# Altium PCB NFC地图卡.pcbdoc
Units mil, origin at the board's own origin, x right, y up, seen from the top; angles counter-clockwise.
Board outline 4649.77 x 2656.52 mil, 2 copper layers (Top Layer, Bottom Layer); 242 components, 94 nets, 711 pads, 3 vias.
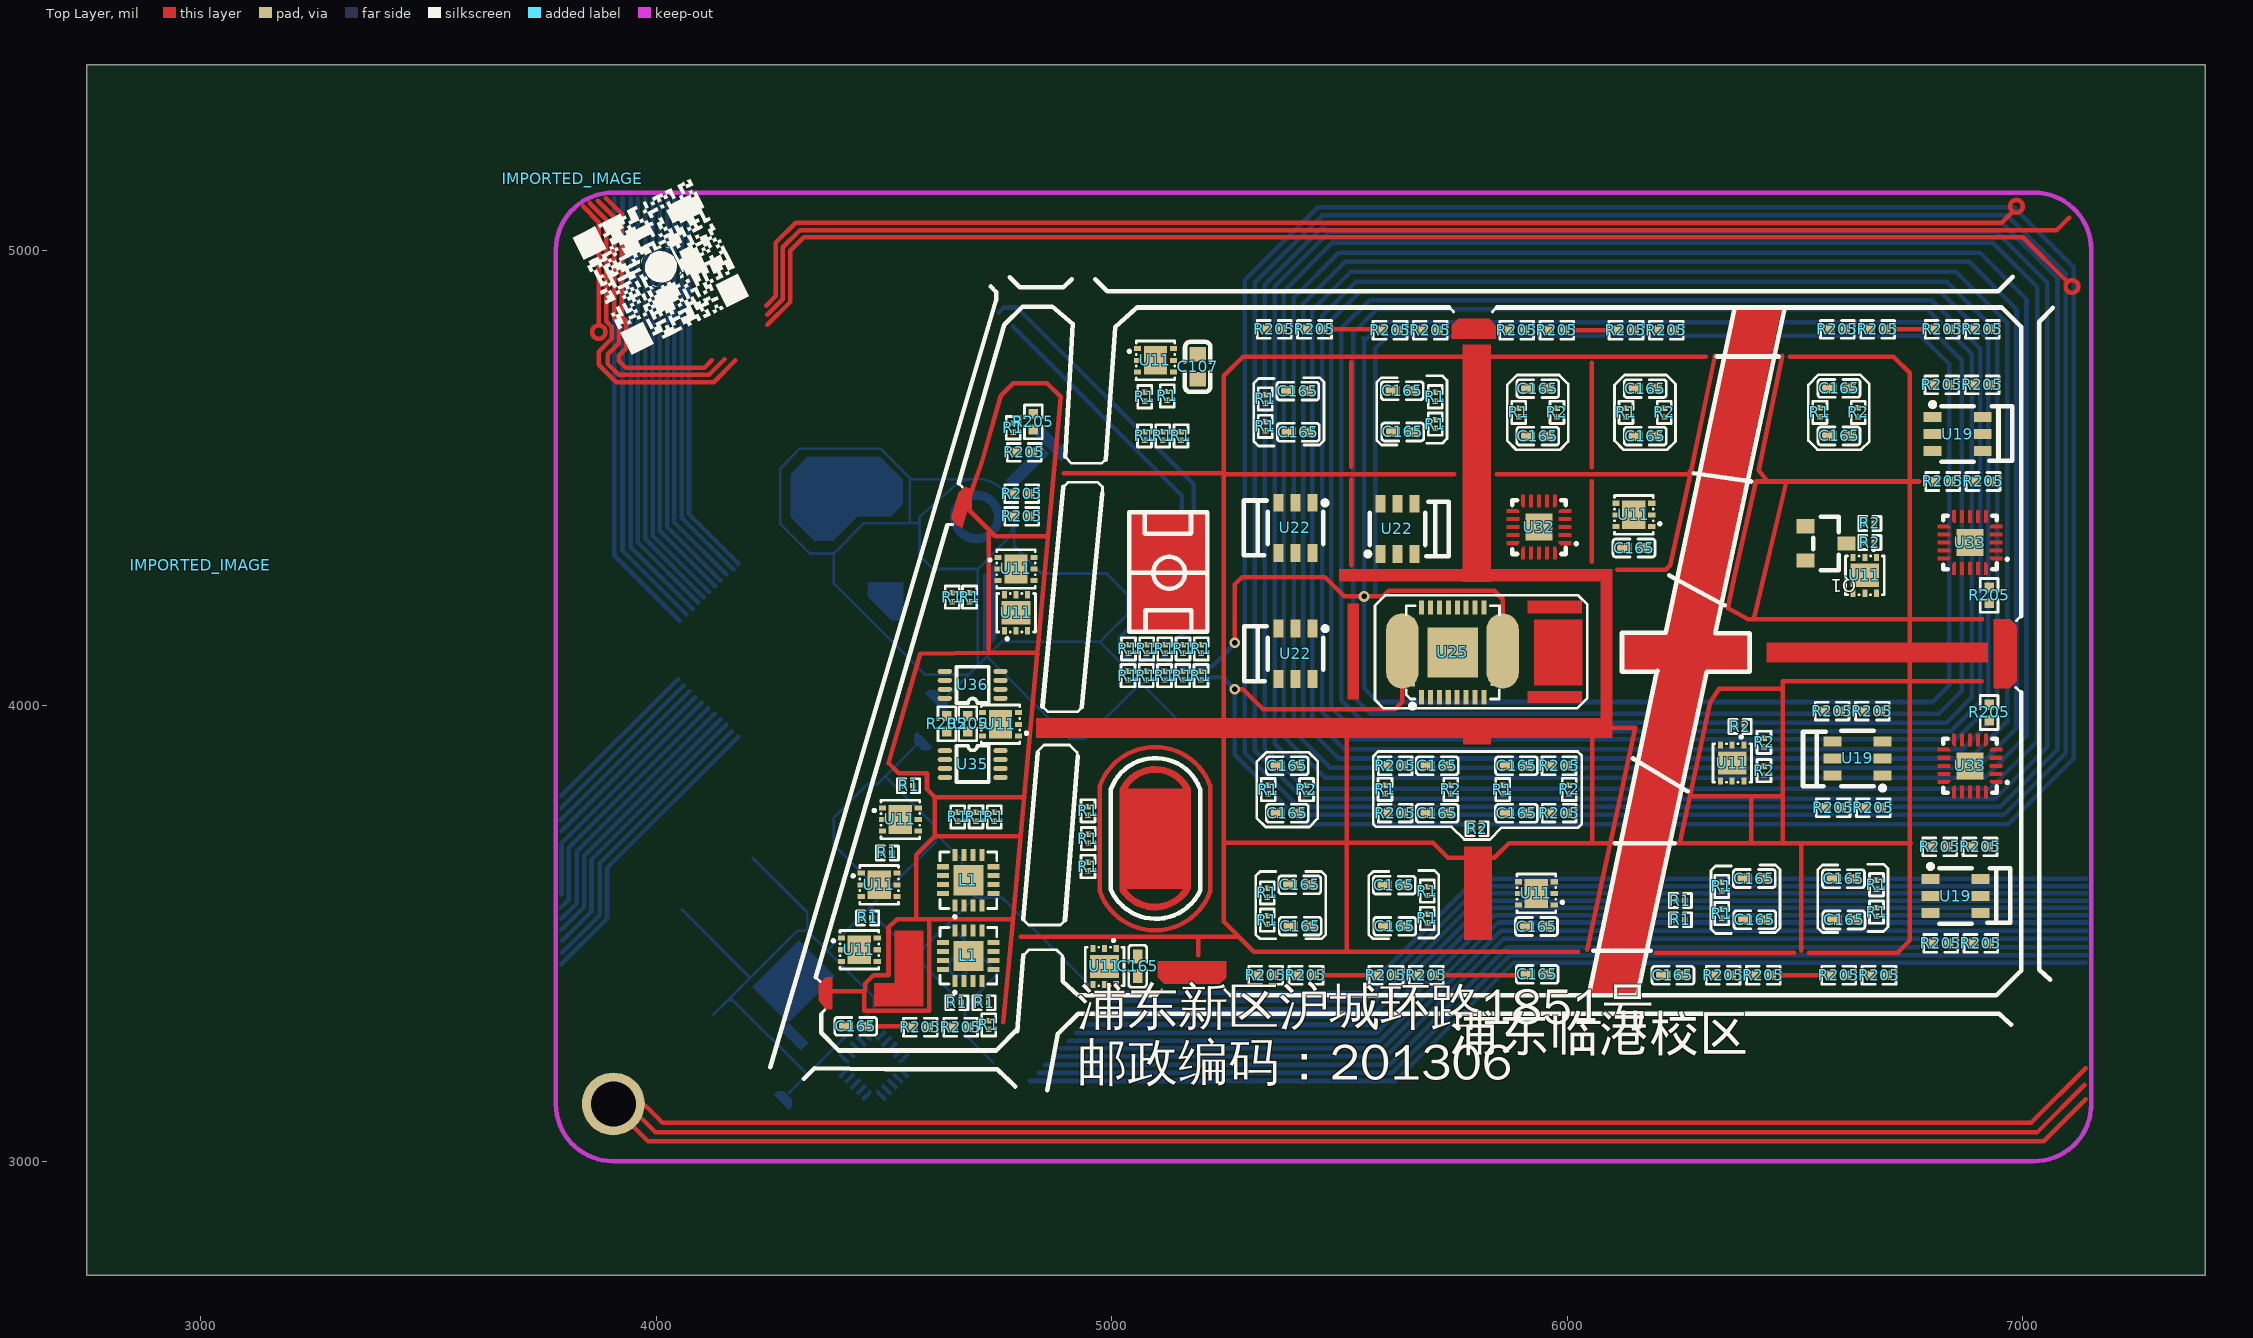
[diagram p0: Top Layer view]
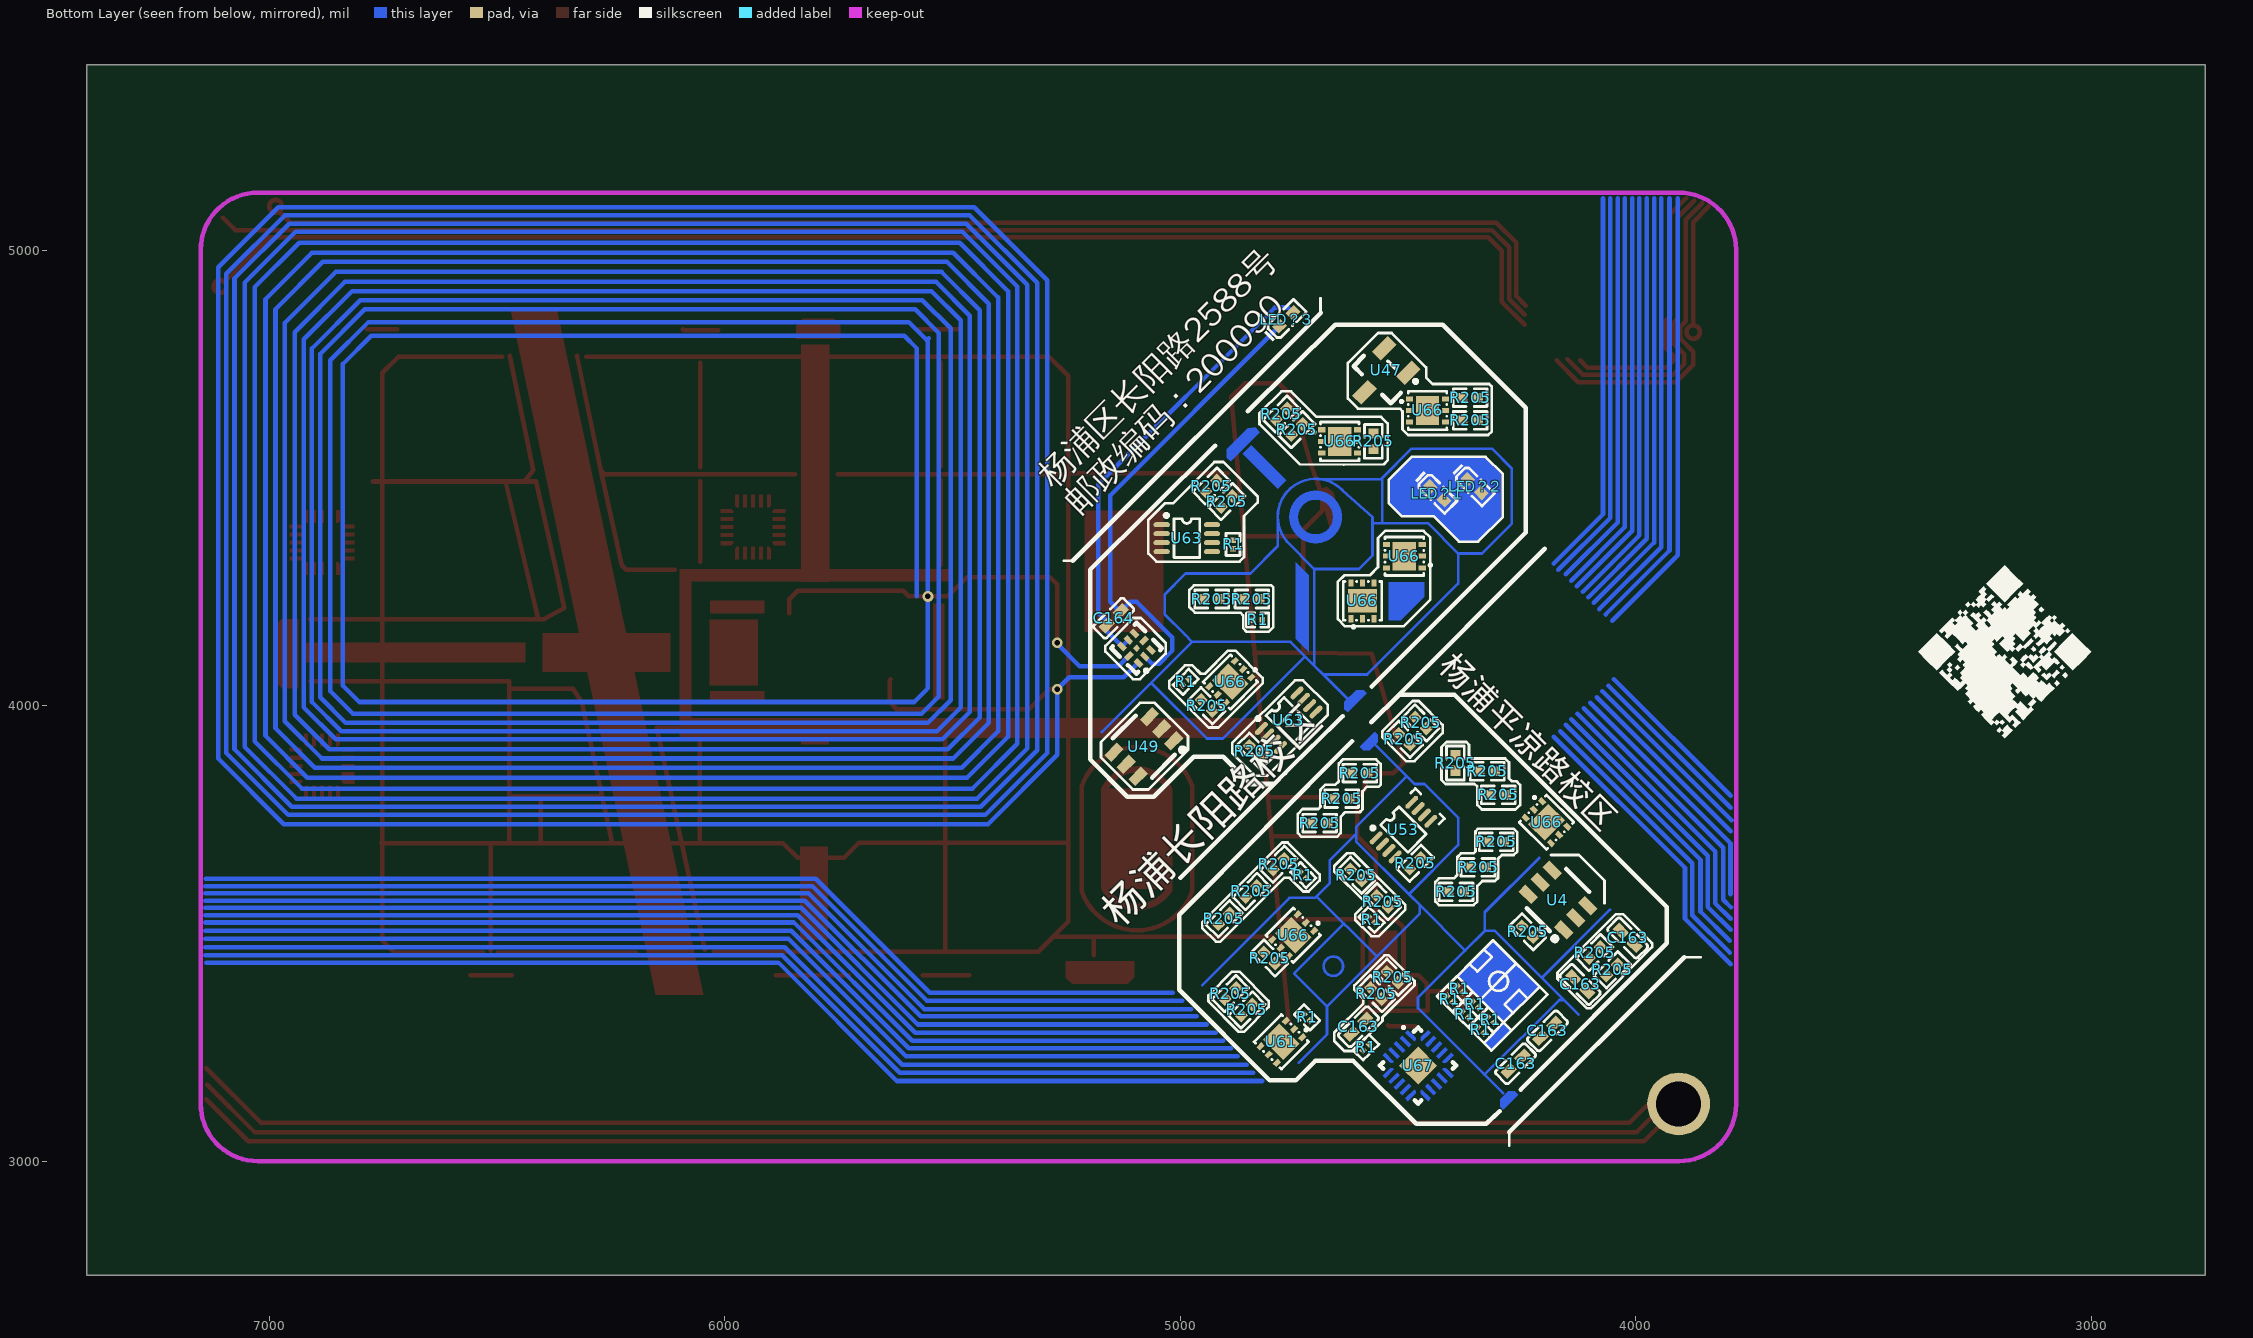
[diagram p1: Bottom Layer view, seen from below]

## Layer stack, top to bottom
Top Layer: signal copper (thickness not stored)
Dielectric: dielectric 12.6, FR-4, Dk 4.8
Bottom Layer: signal copper (thickness not stored)

## Board outline
7399.77,2750 2750,2750 2750,5406.52 7399.77,5406.52

## Components (designator, comment, footprint, x,y, rotation, side; value= is the part's Value field where it differs from the comment)
C107 "0.1u" C0603 5188.42,4744 r90 top
C163 "CAP_0402" C0402 4017.69,3490 r225 bottom
C163 "CAP_0402" C0402 4121.69,3388 r225 bottom
C163 "CAP_0402" C0402 4193.69,3286 r135 bottom
C163 "CAP_0402" C0402 4263.69,3214 r315 bottom
C163 "CAP_0402" C0402 4608.51,3295.17 r315 bottom
C164 "CAP_0402" C0402 5145.69,4192 r315 bottom
C165 "CAP_0402" C0402 5637.41,4691.21 r0 top
C165 "CAP_0402" C0402 5638.51,4600.72 r0 top
C165 "CAP_0402" C0402 5385.15,3868 r0 top
C165 "CAP_0402" C0402 5385.15,3763.67 r0 top
C165 "CAP_0402" C0402 5620,3606 r0 top
C165 "CAP_0402" C0402 5621.11,3515.51 r0 top
C165 "CAP_0402" C0402 6606,3620 r0 top
C165 "CAP_0402" C0402 6607.11,3529.51 r0 top
C165 "CAP_0402" C0402 5409.37,4600 r180 top
C165 "CAP_0402" C0402 5408.27,4690.49 r180 top
C165 "CAP_0402" C0402 5413.37,3516 r180 top
C165 "CAP_0402" C0402 5412.27,3606.49 r180 top
C165 "CAP_0402" C0402 6411.37,3530 r180 top
C165 "CAP_0402" C0402 6410.27,3620.49 r180 top
C165 "CAP_0402" C0402 5714.23,3763.67 r0 top
C165 "CAP_0402" C0402 5714.23,3868 r0 top
C165 "CAP_0402" C0402 5888.23,3763.67 r0 top
C165 "CAP_0402" C0402 5888.23,3868 r0 top
C165 "CAP_0402" C0402 6146.23,4346 r0 top
C165 "CAP_0402" C0402 5932.23,3515.12 r0 top
C165 "CAP_0402" C0402 6231.69,3408 r180 top
C165 "CAP_0402" C0402 5933.45,3410 r180 top
C165 "CAP_0402" C0402 5056.68,3427.96 r90 top
C165 "CAP_0402" C0402 4437.83,3296 r180 top
C165 "CAP_0402" C0402 5935,4696 r0 top
C165 "CAP_0402" C0402 5935,4591.67 r0 top
C165 "CAP_0402" C0402 6170.76,4696 r0 top
C165 "CAP_0402" C0402 6170.76,4591.67 r0 top
C165 "CAP_0402" C0402 6596.13,4696.29 r0 top
C165 "CAP_0402" C0402 6596.13,4591.96 r0 top
IMPORTED_IMAGE "IMPORTED_IMAGE" IMPORTED_IMAGE 3000,4308 r0 top
IMPORTED_IMAGE "IMPORTED_IMAGE" IMPORTED_IMAGE 3816.64,5156.52 r0 top
L1 "SDFL1608Q4R7KTF" VQFN-16_L3.0-W3.0-P0.50-BL-EP 4684.96,3616.81 r0 top
L1 "SDFL1608Q4R7KTF" VQFN-16_L3.0-W3.0-P0.50-BL-EP 4684.96,3450.81 r0 top
LED？1 "LED_0402-R" LED_0402 4435.69,4466 r225 bottom
LED？2 "LED_0402-R" LED_0402 4353.69,4482 r225 bottom
LED？3 "LED_0402-R" LED_0402 4767.05,4848 r135 bottom
Q1 "S8050_SOT_NPN" S8050_SOT-23 6567.61,4361 r180 top
R1 "Res_0201" R0201 4579.69,3530 r225 bottom
R1 "Res_0201" R0201 4729.69,3628 r225 bottom
R1 "Res_0201" R0201 4591.69,3250 r315 bottom
R1 "Res_0201" R0201 4721.47,3315.69 r225 bottom
R1 "Res_0201" R0201 4407.69,3356 r45 bottom
R1 "Res_0201" R0201 4373.69,3322 r45 bottom
R1 "Res_0201" R0201 4339.69,3288 r45 bottom
R1 "Res_0201" R0201 4317.92,3310.47 r45 bottom
R1 "Res_0201" R0201 4351.69,3344 r45 bottom
R1 "Res_0201" R0201 4385.69,3378 r45 bottom
R1 "Res_0201" R0201 4987.69,4052 r315 bottom
R1 "Res_0201" R0201 4829.69,4188 r0 bottom
R1 "Res_0201" R0201 4883.69,4354 r90 bottom
R1 "Res_0201" R0201 5709.9,4678 r90 top
R1 "Res_0201" R0201 5709.9,4618 r90 top
R1 "Res_0201" R0201 5343.15,3815.67 r90 top
R1 "Res_0201" R0201 5692.5,3532.79 r90 top
R1 "Res_0201" R0201 5692.5,3592.79 r90 top
R1 "Res_0201" R0201 6678.5,3546.79 r90 top
R1 "Res_0201" R0201 6678.5,3606.79 r90 top
R1 "Res_0201" R0201 5336.88,4673.21 r270 top
R1 "Res_0201" R0201 5336.88,4613.21 r270 top
R1 "Res_0201" R0201 5340.88,3589.21 r270 top
R1 "Res_0201" R0201 5340.88,3529.21 r270 top
R1 "Res_0201" R0201 6338.88,3603.21 r270 top
R1 "Res_0201" R0201 6338.88,3543.21 r270 top
R1 "Res_0201" R0201 5599.69,3816 r90 top
R1 "Res_0201" R0201 5858.23,3815.67 r90 top
R1 "Res_0201" R0201 5036.31,4124.54 r90 top
R1 "Res_0201" R0201 5076.31,4124.54 r90 top
R1 "Res_0201" R0201 5116.31,4124.54 r90 top
R1 "Res_0201" R0201 5156.31,4124.54 r90 top
R1 "Res_0201" R0201 5196.31,4124.54 r90 top
R1 "Res_0201" R0201 4947.94,3708 r90 top
R1 "Res_0201" R0201 4553.69,3824 r0 top
R1 "Res_0201" R0201 4463.69,3534 r180 top
R1 "Res_0201" R0201 4507.14,3676.53 r180 top
R1 "Res_0201" R0201 4701.69,3756 r270 top
R1 "Res_0201" R0201 4661.69,3756 r270 top
R1 "Res_0201" R0201 4741.69,3756 r270 top
R1 "Res_0201" R0201 4729.69,3299.1 r270 top
R1 "Res_0201" R0201 4719.69,3348 r0 top
R1 "Res_0201" R0201 4659.69,3348 r0 top
R1 "Res_0201" R0201 4783.69,4610 r270 top
R1 "Res_0201" R0201 5893,4643.67 r90 top
R1 "Res_0201" R0201 6128.76,4643.67 r90 top
R1 "Res_0201" R0201 6247.99,3572 r0 top
R1 "Res_0201" R0201 6247.69,3530 r0 top
R1 "Res_0201" R0201 6554.13,4643.96 r90 top
R1 "Res_0201" R0201 5075.59,4065.81 r90 top
R1 "Res_0201" R0201 5115.59,4065.81 r90 top
R1 "Res_0201" R0201 5155.59,4065.81 r90 top
R1 "Res_0201" R0201 5195.59,4065.81 r90 top
R1 "Res_0201" R0201 5035.59,4065.81 r90 top
R1 "Res_0201" R0201 5111.69,4592 r90 top
R1 "Res_0201" R0201 5151.69,4592 r90 top
R1 "Res_0201" R0201 5071.69,4592 r90 top
R1 "Res_0201" R0201 5072.31,4678 r270 top
R1 "Res_0201" R0201 5121.41,4680 r270 top
R1 "Res_0201" R0201 4649.69,4238 r90 top
R1 "Res_0201" R0201 4687.69,4238 r90 top
R1 "Res_0201" R0201 4947.69,3646.86 r90 top
R1 "Res_0201" R0201 4947.69,3768.86 r90 top
R2 "Res_0201" R0201 5427.15,3815.67 r90 top
R2 "Res_0201" R0201 5743.9,3816 r90 top
R2 "Res_0201" R0201 6003.69,3816 r90 top
R2 "Res_0201" R0201 5801.69,3729.74 r180 top
R2 "Res_0201" R0201 6663.69,4358 r180 top
R2 "Res_0201" R0201 6663.69,4400 r180 top
R2 "Res_0201" R0201 6378.92,3954 r180 top
R2 "Res_0201" R0201 6431.69,3857.24 r270 top
R2 "Res_0201" R0201 6431.69,3919.24 r270 top
R2 "Res_0201" R0201 5977,4643.67 r90 top
R2 "Res_0201" R0201 6212.76,4643.67 r90 top
R2 "Res_0201" R0201 6638.13,4643.96 r90 top
R205 "Res_0402" R0402 4471.69,3962 r45 bottom
R205 "Res_0402" R0402 4507.69,3926 r45 bottom
R205 "Res_0402" R0402 4605.36,3851.76 r180 bottom
R205 "Res_0402" R0402 4645.36,3795.76 r180 bottom
R205 "Res_0402" R0402 4693.69,3742 r180 bottom
R205 "Res_0402" R0402 4395.69,3874 r90 bottom
R205 "Res_0402" R0402 4301.69,3804 r180 bottom
R205 "Res_0402" R0402 4325.69,3856 r180 bottom
R205 "Res_0402" R0402 4483.69,3654 r315 bottom
R205 "Res_0402" R0402 4613.69,3628 r225 bottom
R205 "Res_0402" R0402 4555.69,3570 r225 bottom
R205 "Res_0402" R0402 4783.69,3652 r315 bottom
R205 "Res_0402" R0402 4843.69,3592 r315 bottom
R205 "Res_0402" R0402 4903.69,3532 r315 bottom
R205 "Res_0402" R0402 4394.37,3591.13 r180 bottom
R205 "Res_0402" R0402 4346.05,3644.89 r180 bottom
R205 "Res_0402" R0402 4306.05,3700.89 r180 bottom
R205 "Res_0402" R0402 4237.28,3503.59 r225 bottom
R205 "Res_0402" R0402 4051.69,3420 r315 bottom
R205 "Res_0402" R0402 4089.69,3458 r315 bottom
R205 "Res_0402" R0402 4533.64,3403.95 r45 bottom
R205 "Res_0402" R0402 4569.64,3367.95 r45 bottom
R205 "Res_0402" R0402 4803.69,3446 r225 bottom
R205 "Res_0402" R0402 4889.69,3368 r315 bottom
R205 "Res_0402" R0402 4853.69,3332 r315 bottom
R205 "Res_0402" R0402 4835.69,3900 r45 bottom
R205 "Res_0402" R0402 4941.69,4000 r45 bottom
R205 "Res_0402" R0402 4930.51,4234 r180 bottom
R205 "Res_0402" R0402 4842.51,4234 r180 bottom
R205 "Res_0402" R0402 4931.69,4482 r315 bottom
R205 "Res_0402" R0402 4897.69,4448 r315 bottom
R205 "Res_0402" R0402 4575.69,4580 r90 bottom
R205 "Res_0402" R0402 4743.69,4606 r135 bottom
R205 "Res_0402" R0402 4777.69,4640 r315 bottom
R205 "Res_0402" R0402 4363.37,4676.16 r0 bottom
R205 "Res_0402" R0402 4363.37,4626.16 r0 bottom
R205 "Res_0402" R0402 6905.69,3690 r0 top
R205 "Res_0402" R0402 6907.69,3478 r0 top
R205 "Res_0402" R0402 6817.37,3690 r0 top
R205 "Res_0402" R0402 6819.37,3478 r0 top
R205 "Res_0402" R0402 6821.94,4704.01 r0 top
R205 "Res_0402" R0402 6910.25,4704.01 r0 top
R205 "Res_0402" R0402 6823.94,4492.01 r0 top
R205 "Res_0402" R0402 6912.25,4492.01 r0 top
R205 "Res_0402" R0402 6671.44,3775.99 r180 top
R205 "Res_0402" R0402 6583.12,3775.99 r180 top
R205 "Res_0402" R0402 6669.44,3987.99 r180 top
R205 "Res_0402" R0402 6581.12,3987.99 r180 top
R205 "Res_0402" R0402 6925.69,3984.93 r90 top
R205 "Res_0402" R0402 6925.69,4242 r90 top
R205 "Res_0402" R0402 5621.69,3868 r0 top
R205 "Res_0402" R0402 5621.69,3764 r0 top
R205 "Res_0402" R0402 5981.56,3868 r0 top
R205 "Res_0402" R0402 5981.69,3764 r0 top
R205 "Res_0402" R0402 4637.69,3960.32 r90 top
R205 "Res_0402" R0402 4683.69,3960.32 r90 top
R205 "Res_0402" R0402 6684,3408 r180 top
R205 "Res_0402" R0402 6595.69,3408 r180 top
R205 "Res_0402" R0402 6430,3408 r180 top
R205 "Res_0402" R0402 6341.69,3408 r180 top
R205 "Res_0402" R0402 5426,3408 r180 top
R205 "Res_0402" R0402 5337.69,3408 r180 top
R205 "Res_0402" R0402 5690,3408 r180 top
R205 "Res_0402" R0402 5601.69,3408 r180 top
R205 "Res_0402" R0402 6592.51,4826 r180 top
R205 "Res_0402" R0402 6680.82,4826 r180 top
R205 "Res_0402" R0402 6822.51,4826 r180 top
R205 "Res_0402" R0402 6910.82,4826 r180 top
R205 "Res_0402" R0402 5888.51,4824 r180 top
R205 "Res_0402" R0402 5976.82,4824 r180 top
R205 "Res_0402" R0402 6128.51,4824 r180 top
R205 "Res_0402" R0402 6216.82,4824 r180 top
R205 "Res_0402" R0402 5356.51,4826 r180 top
R205 "Res_0402" R0402 5444.82,4826 r180 top
R205 "Res_0402" R0402 5610.51,4824 r180 top
R205 "Res_0402" R0402 5698.82,4824 r180 top
R205 "Res_0402" R0402 4667.85,3294 r180 top
R205 "Res_0402" R0402 4579.53,3294 r180 top
R205 "Res_0402" R0402 4802.17,4465.43 r180 top
R205 "Res_0402" R0402 4802.17,4415.43 r180 top
R205 "Res_0402" R0402 4827.69,4623 r270 top
R205 "Res_0402" R0402 4807.69,4556 r0 top
U4 "ADC081S021CIMFX/NOPB" SOT-23-6_L2.9-W1.6-P0.95-LS2.8-BR 4170.51,3573.17 r225 bottom
U11 "AM01B" DFN-6_L2.0-W2.0-P0.65-BL-EP 4755.45,3959.06 r90 top
U11 "AM01B" DFN-6_L2.0-W2.0-P0.65-BL-EP 6145.69,4418.67 r90 top
U11 "AM01B" DFN-6_L2.0-W2.0-P0.65-BL-EP 6652.77,4286 r180 top
U11 "AM01B" DFN-6_L2.0-W2.0-P0.65-BL-EP 5931.69,3587.79 r90 top
U11 "AM01B" DFN-6_L2.0-W2.0-P0.65-BL-EP 6361.7,3874 r180 top
U11 "AM01B" DFN-6_L2.0-W2.0-P0.65-BL-EP 4984,3427.42 r180 top
U11 "AM01B" DFN-6_L2.0-W2.0-P0.65-BL-EP 4445.7,3464.13 r270 top
U11 "AM01B" DFN-6_L2.0-W2.0-P0.65-BL-EP 4535.7,3750.13 r270 top
U11 "AM01B" DFN-6_L2.0-W2.0-P0.65-BL-EP 4489.15,3606.66 r270 top
U11 "AM01B" DFN-6_L2.0-W2.0-P0.65-BL-EP 4789.56,4300.02 r270 top
U11 "AM01B" DFN-6_L2.0-W2.0-P0.65-BL-EP 4789.67,4203.87 r0 top
U11 "AM01B" DFN-6_L2.0-W2.0-P0.65-BL-EP 5095.56,4758.01 r270 top
U19 "ADC081S021CIMFX/NOPB" SOT-23-6_L2.9-W1.6-P0.95-LS2.8-BR 6852,3582 r180 top
U19 "ADC081S021CIMFX/NOPB" SOT-23-6_L2.9-W1.6-P0.95-LS2.8-BR 6856.57,4596.01 r180 top
U19 "ADC081S021CIMFX/NOPB" SOT-23-6_L2.9-W1.6-P0.95-LS2.8-BR 6636.81,3883.99 r0 top
U22 "ADC081S021CIMFX/NOPB" SOT-23-6_L2.9-W1.6-P0.95-LS2.8-BR 5626.81,4388.01 r270 top
U22 "ADC081S021CIMFX/NOPB" SOT-23-6_L2.9-W1.6-P0.95-LS2.8-BR 5402.81,4390.24 r90 top
U22 "ADC081S021CIMFX/NOPB" SOT-23-6_L2.9-W1.6-P0.95-LS2.8-BR 5403.2,4114 r90 top
U25 "AT42QT1110-MUR" qfn-32_l5.0-w5.0-p0.50-bl-ep3.4 5748.25,4116.95 r0 top
U32 "AT42QT1040-MMHR" VQFN-20_L3.0-W3.0-P0.45-TL-EP 5937.69,4391.93 r180 top
U33 "AT42QT1040-MMHR" VQFN-20_L3.0-W3.0-P0.45-TL-EP 6883.69,3867.88 r180 top
U33 "AT42QT1040-MMHR" VQFN-20_L3.0-W3.0-P0.45-TL-EP 6883.69,4358 r180 top
U35 "74HC2G00DC,125" VSSOP-8_L2.1-W2.4-P0.50-LS3.2-BL 4694.44,3871.68 r270 top
U36 "74HC2G00DC,125" VSSOP-8_L2.1-W2.4-P0.50-LS3.2-BL 4694.44,4045.68 r90 top
U47 "BC817-25-QR" SOT-23-3_L2.9-W1.5-P1.90-LS2.6-BR 4560.49,4722.8 r135 bottom
U49 "ADC081S021CIMFX/NOPB" SOT-23-6_L2.9-W1.6-P0.95-LS2.8-BR 5079.69,3910 r135 bottom
U53 "SN74LVC1G123DCUR_C352969" VSSOP-8_L2.3-W2.0-P0.50-LS3.1-BL 4509.69,3728 r225 bottom
U61 "AM01B" DFN-6_L2.0-W2.0-P0.65-BL-EP 4777.68,3261.99 r45 bottom
U63 "SN74LVC1G123DCUR_C352969" VSSOP-8_L2.3-W2.0-P0.50-LS3.1-BL 4761.69,3968 r225 bottom
U63 "SN74LVC1G123DCUR_C352969" VSSOP-8_L2.3-W2.0-P0.50-LS3.1-BL 4985.27,4367.58 r270 bottom
U66 "AM01B" DFN-6_L2.0-W2.0-P0.65-BL-EP 4195.69,3744 r315 bottom
U66 "AM01B" DFN-6_L2.0-W2.0-P0.65-BL-EP 4751.68,3495.99 r45 bottom
U66 "AM01B" DFN-6_L2.0-W2.0-P0.65-BL-EP 4889.68,4051.99 r45 bottom
U66 "AM01B" DFN-6_L2.0-W2.0-P0.65-BL-EP 4507.69,4328 r90 bottom
U66 "AM01B" DFN-6_L2.0-W2.0-P0.65-BL-EP 4599.7,4230 r180 bottom
U66 "AM01B" DFN-6_L2.0-W2.0-P0.65-BL-EP 4456.8,4648.02 r270 bottom
U66 "AM01B" DFN-6_L2.0-W2.0-P0.65-BL-EP 4649.69,4580.01 r270 bottom
U67 "AT42QT1040-MMHR" VQFN-20_L3.0-W3.0-P0.45-TL-EP 4477.69,3210 r225 bottom
? "NT3H1101W0FHKH" XQFN-8_L1.6-W1.6-P0.50-BR 5095.69,4126 r225 bottom

## Footprints (in the part's own frame and the unit in brackets; to place one, negate y for a bottom-side part, rotate by r counter-clockwise, add the part's x,y. Pads: shape width x height; smd on the part's side, far side on the other; paste and mask are expansions set on the pad)
C0402 [mm]
  rect 0.79x0.54 smd paste-100 mask+0.051: 1(-0.545,0) 2(0.545,0)
  silkscreen extent -1.17,-0.5 1.17,0.5
C0603 [mm]
  rect 0.8x0.9 smd paste+0 mask+0.051: 1(-0.7,0) 2(0.7,0)
  silkscreen extent -1.41,-0.71 1.39,0.72
DFN-6_L2.0-W2.0-P0.65-BL-EP [mm]
  rect 0.28x0.4 smd paste+0 mask+0.05: 1(-0.65,-1) 2(0,-1) 3(0.65,-1) 4(0.65,1) 5(0,1) 6(-0.65,1)
  rect 1.6x1.3 smd paste+0 mask+0.05: 7(0,0)
  silkscreen extent -1.08,-1.52 1.08,1.08
IMPORTED_IMAGE [mil]
LED_0402 [mil]
  rect 25.1x21.3 smd paste-3937.01 mask+2: 1(-21.2,0) 2(21.2,0)
  silkscreen extent -55,-21 43,21
qfn-32_l5.0-w5.0-p0.50-bl-ep3.4 [mm]
  oval 1.8x4.2 smd mask+0.051: 1(-2.814,0.071) 1(2.786,0.071)
  rect 0.28x0.8 smd paste+0 mask+0.051: 1(-1.75,-2.5) 2(-1.251,-2.5) 3(-0.751,-2.5) 4(-0.251,-2.5) 5(0.249,-2.5) 6(0.749,-2.5) 7(1.249,-2.5) 8(1.749,-2.5) 17(1.752,2.5) 18(1.251,2.5) 19(0.752,2.5) 20(0.251,2.5) 21(-0.248,2.5) 22(-0.749,2.5) 23(-1.248,2.5) 24(-1.749,2.5)
  rect 0.8x0.28 smd paste+0 mask+0.051: 9(2.5,-1.748) 10(2.5,-1.248) 11(2.5,-0.748) 12(2.5,-0.248) 13(2.5,0.252) 14(2.5,0.752) 15(2.5,1.252) 16(2.5,1.752) 25(-2.5,1.75) 26(-2.5,1.25) 27(-2.5,0.75) 28(-2.5,0.25) 29(-2.5,-0.25) 30(-2.5,-0.75) 31(-2.5,-1.25) 32(-2.5,-1.75)
  rect 2.794x2.794 smd paste+0 mask+0.051: 33(0,0)
  silkscreen extent -2.6,-3.12 2.6,2.6
R0201 [mil]
  rect 11.93x12.76 smd paste-3937.01 mask+2: 1(-9.51,0) 2(9.51,0)
  silkscreen extent -24,-15 24,15
R0402 [mm]
  rect 0.566x0.54 smd paste-100 mask+0.051: 1(-0.433,0) 2(0.433,0)
  silkscreen extent -0.94,-0.5 0.94,0.5
S8050_SOT-23 [mm]
  rect 1x0.8 smd paste+0 mask+0.051: 1(1.15,-0.823) 2(1.15,1.077) 3(-1.15,0.127)
  silkscreen extent -0.7,-1.37 0.7,1.63
SOT-23-3_L2.9-W1.5-P1.90-LS2.6-BR [mm]
  rect 1.25x0.7 smd paste+0 mask+0.051: 1(1.25,-0.95) 2(1.25,0.95) 3(-1.25,0)
  silkscreen extent -0.65,-1.69 1.29,1.46
SOT-23-6_L2.9-W1.6-P0.95-LS2.8-BR [mm]
  rect 1x0.55 smd paste+0 mask+0.051: 1(1.4,-0.95) 2(1.4,0) 3(1.4,0.95) 4(-1.4,0.95) 5(-1.4,0) 6(-1.4,-0.95)
  silkscreen extent -0.9,-1.78 1.52,1.55
VQFN-16_L3.0-W3.0-P0.50-BL-EP [mm]
  rect 0.28x0.665 smd paste-100 mask+0.051: 1(-0.75,-1.407) 2(-0.25,-1.407) 3(0.25,-1.407) 4(0.75,-1.407) 9(0.75,1.407) 10(0.25,1.407) 11(-0.25,1.407) 12(-0.75,1.407)
  rect 0.665x0.28 smd paste-100 mask+0.051: 5(1.407,-0.75) 6(1.407,-0.25) 7(1.407,0.25) 8(1.407,0.75) 13(-1.407,0.75) 14(-1.407,0.25) 15(-1.407,-0.25) 16(-1.407,-0.75)
  rect 1.68x1.68 smd paste-100 mask+0.051: 17(0,0)
  silkscreen extent -1.58,-2.11 1.58,1.58
VQFN-20_L3.0-W3.0-P0.45-TL-EP [mm]
  rect 1.5x1.5 smd paste+0 mask+0.05: 21(0,0)
  Top Layer region: 0.55,-1.7 0.55,-1.8 0.35,-1.8 0.35,-1.1 0.55,-1.1
  Top Layer region: -0.8,-1.1 -0.8,-1.8 -1,-1.8 -1,-1.25 -1,-1.2 -0.9,-1.1
  Top Layer region: -1.1,0.8 -1.8,0.8 -1.8,1 -1.25,1 -1.2,1 -1.1,0.9
  Top Layer region: 1.1,0.8 1.8,0.8 1.8,1 1.25,1 1.2,1 1.1,0.9
  Top Layer region: 0.8,1.1 0.8,1.8 1,1.8 1,1.25 1,1.2 0.9,1.1
  Top Layer region: 0.8,-1.1 0.8,-1.8 1,-1.8 1,-1.25 1,-1.2 0.9,-1.1
  Top Layer region: 1.1,-0.8 1.8,-0.8 1.8,-1 1.25,-1 1.2,-1 1.1,-0.9
  Top Layer region: 0.1,1.2 0.1,1.1 -0.1,1.1 -0.1,1.8 0.1,1.8
  Top Layer region: 0.55,1.2 0.55,1.1 0.35,1.1 0.35,1.8 0.55,1.8
  Top Layer region: 1.2,0.35 1.1,0.35 1.1,0.55 1.8,0.55 1.8,0.35
  Top Layer region: 1.2,-0.1 1.1,-0.1 1.1,0.1 1.8,0.1 1.8,-0.1
  Top Layer region: 1.2,-0.55 1.1,-0.55 1.1,-0.35 1.8,-0.35 1.8,-0.55
  Top Layer region: -1.2,0.35 -1.1,0.35 -1.1,0.55 -1.8,0.55 -1.8,0.35
  Top Layer region: -1.2,-0.1 -1.1,-0.1 -1.1,0.1 -1.8,0.1 -1.8,-0.1
  Top Layer region: -1.2,-0.55 -1.1,-0.55 -1.1,-0.35 -1.8,-0.35 -1.8,-0.55
  Top Layer region: -1.1,-0.8 -1.8,-0.8 -1.8,-1 -1.25,-1 -1.2,-1 -1.1,-0.9
  Top Layer region: -0.55,-1.7 -0.55,-1.8 -0.35,-1.8 -0.35,-1.1 -0.55,-1.1
  Top Layer region: -0.1,-1.7 -0.1,-1.8 0.1,-1.8 0.1,-1.1 -0.1,-1.1
  Top Layer region: -0.55,1.2 -0.55,1.1 -0.35,1.1 -0.35,1.8 -0.55,1.8
  Top Layer region: -0.8,1.1 -0.8,1.8 -1,1.8 -1,1.25 -1,1.2 -0.9,1.1
  silkscreen extent -2.15,-1.5 1.5,1.5
VSSOP-8_L2.1-W2.4-P0.50-LS3.2-BL [mm]
  oval 0.28x0.8 smd paste+0 mask+0.051: 1(-0.75,-1.55) 2(-0.25,-1.55) 3(0.25,-1.55) 4(0.75,-1.55) 5(0.75,1.55) 6(0.25,1.55) 7(-0.25,1.55) 8(-0.75,1.55)
  silkscreen extent -1.02,-0.9 1,0.9
VSSOP-8_L2.3-W2.0-P0.50-LS3.1-BL [mm]
  oval 0.28x0.905 smd paste+0 mask+0.051: 1(-0.75,-1.402) 2(-0.25,-1.403) 3(0.25,-1.403) 4(0.75,-1.402) 5(0.75,1.403) 6(0.25,1.403) 7(-0.25,1.403) 8(-0.75,1.403)
  silkscreen extent -1.37,-1.24 1.08,0.72
XQFN-8_L1.6-W1.6-P0.50-BR [mm]
  rect 0.5x0.3 smd paste+0 mask+0.051: 1(0.65,-0.5) 2(0.65,0) 3(0.65,0.5) 5(-0.65,0.5) 6(-0.65,0) 7(-0.65,-0.5)
  rect 0.3x0.5 smd paste+0 mask+0.051: 4(0,0.6) 8(0,-0.6)
  rect 0.3x0.3 smd paste+0 mask+0.051: 9(0,0)
  silkscreen extent -1,-1 1.33,1

## Free pads (board coordinates)
  round 137.8 hole 98.43 mask+2: 1(3905.69,3125.79)

## Via types
v1: diameter 24, hole 12, Top Layer to Bottom Layer, 3 vias

## Nets (pads, with @x,y where several pads share a name; then routed paths per layer and width w, separated by ;. In a path a pad name is that pad's centre, name@x,y a point inside that pad or via, vN(x,y) a via of type N, cw(c..) or ccw(c..) an arc to the next point about the centre after c; other vN are vias at no path point)
1: 
C1_1: C107.1
C1_2: C107.2
S$45027:  | length 337.7
  Top Layer w14.96: 5023.69,3596 ccw(c5094.02,3642.01) 5163.69,3595 ; 5025.69,3818 cw(c5095.43,3781.1) 5165.69,3817
S$45063:  | length 1091.9
  Top Layer w10: 4973.69,3823 4973.69,3592 ccw(c5094.69,3635.29) 5215.69,3592 ; 4973.69,3824 cw(c5094.64,3780.51) 5215.73,3823.64 ; 5215.69,3594 5215.69,3824
S$61466:  | length 58.1
  Top Layer w10: 6091.69,3954 6094.58,3951.11 6148.63,3951.11
S$96601:  | length 923.6
  Bottom Layer w10: 4745.69,4414.08 ccw(c4702.69,4414.08) 4745.69,4414.08 ; 4755.69,4414.08 ccw(c4702.69,4414.08) 4755.69,4414.08
  Bottom Layer w13.78: 4753.69,4414.08 ccw(c4702.69,4414.08) 4753.69,4414.08
U2_1: U47.1
U2_2: U47.2
U2_3: U47.3
U3_2:  | length 413.8
  Top Layer w10: 6412.9,4490.21 6366.47,4281.79 6351.69,4214 6395.69,4190 6476.46,4190
U4_1: U4.1 U19.1 U22.1 U49.1
U4_2: U4.2 U19.2 U22.2 U49.2
U4_3: U4.3 U19.3 U22.3 U49.3
U4_4: U4.4 U19.4 U22.4 U49.4
U4_5: U4.5 U19.5 U22.5 U49.5
U4_6: U4.6 U19.6 U22.6 U49.6
U7_1: U53.1 U63.1
U7_2: U53.2 U63.2
U7_3: U53.3 U63.3
U7_4: U53.4 U63.4
U7_5: U53.5 U63.5
U7_6: U53.6 U63.6 | length 1815
  Bottom Layer w5.91: 4389.69,4334 4389.69,4268 4589.4,4068.29 4685.98,4068.29 ; 4631.69,4014 4757.69,4140 4973.69,4140 ; 4705.69,4089.78 4705.69,4300 ; 4725.69,4108 4905.69,3928 4941.25,3928 5063.47,4050.22 ; 4989.69,4156 4973.69,4140 ; 5171.69,3942 4973.69,4140
U7_7: U53.7 U63.7
U7_8: U53.8 U63.8
U8_1: U35.1 U36.1
U8_2: U35.2 U36.2
U8_3: U35.3 U36.3
U8_4: U35.4 U36.4
U8_5: U35.5 U36.5
U8_6: U35.6 U36.6
U8_7: U35.7 U36.7
U8_8: U35.8 U36.8
U11_1: U11.1 U61.1 U66.1
U11_2: U11.2 U61.2 U66.2
U11_3: U11.3 U61.3 U66.3
U11_4: U11.4 U61.4 U66.4
U11_5: U11.5 U61.5 U66.5
U11_6: U11.6 U61.6 U66.6
U11_7: U11.7 U61.7 U66.7
U15_1: 
U15_2: 
U15_3: 
U15_4: 
U15_5: 
U15_6: 
U15_7: 
U15_8: 
U15_9: 
U15_10: 
U15_11: 
U15_12: 
U15_13: 
U15_14:  | length 11207.3
  Top Layer w10: 4381.61,3372.76 4456.44,3372.76 ; 4592.84,3530.85 4528.75,3530.85 4509.69,3514 4509.69,3408 4476.79,3408 4458.96,3390.18 4458.96,3379.28 4456.44,3372.76 ; 4599.29,3530.85 4599.29,3330 4456.44,3330 4456.44,3372.76 ; 4609.69,3798 4611.05,3799.36 ; 4729.52,4379.08 4729.52,4116 ; 4761.69,3305.09 4780,3500.31 ; 4780.03,3499.89 4837.69,4128 ; 4782.87,3530.85 4570.84,3530.85 4570.65,3553.04 4570.65,3672.93 4611.05,3713.33 ; 4799.69,3714 4799.02,3713.33 4611.05,3713.33 ; 4800.03,3493 5278.69,3493 ; 4807.52,3799.36 4611.05,3799.36 ; 4836.89,4124.16 4887.69,4678 4857.69,4708 4783.69,4708 4755.69,4680 4713.69,4532 4687.69,4460.15 4687.69,4428 4743.92,4371.77 4859.6,4371.77 ; 4837.69,4114 4835.69,4116 4729.52,4116 ; 5189.46,3452 5189.46,3492.76 ; 5249.66,3698.7 5704.99,3698.7 5737.69,3666 5839.69,3666 5871.69,3698 6753.71,3698 ; 5515.69,3698 5515.69,3464 5517.69,3462 ; 5515.96,3936 5515.96,3702 5517.96,3700 ; 6043.64,3464.45 6097.56,3713.55 ; 6053.69,4316 6053.69,4492.94 ; 6054.05,3934 6054.05,3700 6056.05,3698 ; 6097.21,3700 6095.21,3702 6148.63,3951.11 ; 6246.6,3698 6313.58,4008 6332.38,4036.69 6472.29,4036.69 ; 6268.92,3801.28 6472.29,3801.28 ; 6401.69,3700 6403.81,3702.12 6403.81,3801.28 ; 6409.23,4190 6480.9,4492.21 ; 6413.69,4492 6771.69,4492 ; 6439.76,4492 6420,4516.43 6471.8,4768 ; 6472.29,3698 6472.29,4054 6909.52,4054 ; 6476.46,4190 6910.39,4190 ; 6509.73,3698 6512.96,3694.76 6512.96,3462 ; 4611.05,3713.33 4611.05,3799.36 ; 4611.05,3799.36 4594.11,3816.3 4594.11,3851.55 4532.14,3851.55 4509.69,3874 4579.69,4114 4729.52,4116
U15_15: 
U15_16: 
U15_17: 
U15_18: 
U15_19: 
U15_20: 
U15_21: U32.21 U33.21 U67.21
U16_2: U25.2
U16_3: U25.3
U16_4: U25.4
U16_5: U25.5
U16_6: U25.6
U16_7: U25.7
U16_8: U25.8
U16_9: U25.9
U16_10: U25.10
U16_11: U25.11
U16_12: U25.12
U16_13: U25.13
U16_14: U25.14
U16_15: U25.15
U16_16: U25.16
U16_17: U25.17
U16_18: U25.18
U16_19: U25.19
U16_20: U25.20
U16_21: U25.21
U16_22: U25.22
U16_23: U25.23
U16_24: U25.24
U16_25: U25.25
U16_26: U25.26
U16_27: U25.27
U16_28: U25.28
U16_29: U25.29
U16_30: U25.30
U16_31: U25.31
U16_32: U25.32 | length 27.3
  Top Layer w10: 5635.69,4058 5637.69,4056 5637.69,4031.54
U16_33: U25.33
"": ?.1 ?.2 ?.3 ?.4 ?.5 ?.6 ?.7 ?.8 ?.9 C163.1 C163.2 C164.1 C164.2 C165.1 C165.2 L1.1 L1.2 L1.3 L1.4 L1.5 L1.6 L1.7 L1.8 L1.9 L1.10 L1.11 L1.12 L1.13 L1.14 L1.15 L1.16 L1.17 LED？1.1 LED？1.2 LED？2.1 LED？2.2 LED？3.1 LED？3.2 pad.1 Q1.1 Q1.2 Q1.3 R1.1 R1.2 R2.1 R2.2 R205.1 R205.2 U25.1 | length 153966
  Top Layer w10: 3839.69,5096 3873.69,5061.19 3873.69,4834.75 ; 3853.69,5104 3853.69,5102.88 3889.69,5066.88 3889.69,4844 3901.69,4832 3901.69,4804.98 3873.69,4776.98 3873.69,4748 3911.69,4710 4020.31,4710 4125.69,4710 4173.69,4758 ; 3871.69,5108 3907.69,5072 3907.69,4850 3917.69,4840 3917.69,4795.28 3893.69,4771.28 3893.69,4750 3917.69,4726 4019.72,4726 ; 3889.43,5114 3923.69,5079.74 3923.69,4854.47 3933.69,4844.47 3933.69,4784.25 3917.69,4768.25 3917.69,4757.21 3933.69,4741.21 3934.48,4742 4020.31,4742 4105.69,4742 4121.86,4758.18 ; 3951.69,3074 3981.69,3044 7045.69,3044 7137.69,3136 ; 3969.69,3092 3997.69,3064 7031.69,3064 7135.69,3168 ; 3977.69,3120 4013.69,3084 7017.69,3084 7137.69,3204 ; 4001.72,4726 4115.69,4726 4149.69,4760 ; 4241.69,4878 4261.69,4898.35 4261.69,5016 4305.69,5060 6953.69,5060 6975.69,5082 ; 4243.69,4836 4293.85,4886.16 4293.85,4897.02 4293.85,4998.32 4323.85,5028 6999.69,5028 7097.69,4930 ; 4243.69,4858 4277.69,4892 4277.69,4897.36 4277.69,5006 4315.69,5044 7074.08,5044 7101.08,5071 ; 4483.84,3296 4541.69,3296 4543.69,3298 ; 4894.21,4510 5243.65,4510 ; 5247.19,4508 5751.69,4508 ; v1(5269.69,4036) 5287.69,4036 5331.69,3992 5621.69,3992 5637.69,4008 5637.69,4031.54 ; v1(5269.69,4138) 5269.69,4266 5285.69,4282 5467.69,4282 5509.69,4240 v1(5553.69,4240) 5595.63,4240 5607.63,4252 5839.69,4252 5857.92,4233.76 5857.92,4202.44 ; 5463.18,3408 5564.51,3408 ; 5482,4826 5573.33,4826 ; 5525.69,4308.5 5525.69,4496 ; 5525.69,4524.12 5525.69,4754 ; 5727.18,3408 5887.44,3408 ; 5845.19,4508 6263.69,4508 6272.11,4516.43 ; 6014,4824 6089.69,4824 6091.69,4826 ; 6024.01,3460 5311.69,3460 5245.69,3526 5245.69,4724 5287.69,4766 6304,4766 ; 6053.69,4523.06 6053.69,4752.94 ; 6109.69,4298 6215.69,4298 6225.69,4308 6272.11,4516.43 ; 6193.69,3458 6497.47,3458 ; 6323.91,4768 6272.11,4516.43 ; 6467.18,3408 6558.51,3408 ; 6487.68,4766 6715.69,4766 6751.3,4730.39 6751.3,3484.54 6726.76,3460 ; 6529.69,3458 6725.69,3458 ; 6718,4826 6785.33,4826 ; 3888.44,4820 ccw(c3873.69,4820) 3888.44,4820 ; 6999.69,5096 ccw(c6985.69,5096) 6999.69,5096 ; 7121.69,4920 ccw(c7107.69,4920) 7121.69,4920
  Bottom Layer w5.91: 4055.69,3552 4056.72,3552 4206.2,3402.52 ; 4125.69,3322 4157.69,3354 ; 4211.69,3666 4331.28,3546.41 4331.28,3505.58 ; 4291.15,3149.46 4331.69,3190 ; 4556.45,4400.49 4556.45,4482.62 4556.45,4496.62 4697.86,4496.62 ; 4557.69,4498 4491.69,4564 4315.69,4564 4271.69,4520 4271.69,4400 4337.69,4334 4389.69,4334 4456.18,4400.49 4577.69,4400.49 ; 4569.32,3448.37 4569.32,3450.63 4700.19,3581.5 ; 4569.69,3912.13 4501.1,3843.55 ; 4613.69,3718 4671.69,3660 4671.69,3610 4703.69,3578 4759.69,3578 4951.69,3386 ; 4640.26,3521.57 4749.76,3412.07 4677.69,3340 ; 4643.42,4472.22 4577.69,4414 4577.69,4330 4607.69,4300 4705.69,4300 4765.69,4360 ; 4643.42,4472.87 cw(c4702.69,4414.73) 4765.69,4360.65 ; 4739.69,3216 4677.69,3278 4677.69,3340 ; 4785.69,4415.87 4785.69,4349.99 4845.69,4290 4987.69,4290 5033.69,4244 5033.69,4200 4989.69,4156 ; 4157.69,3354 4309.27,3505.58 4331.28,3505.58 ; 4157.69,3354 4167.69,3354 4331.69,3190 ; 4331.28,3505.58 4374.28,3462.59 ; 4331.69,3190 4477.69,3336 4477.69,3359.09 4374.19,3462.59 4374.28,3462.59 ; 4374.28,3462.59 4473.69,3562 ; 4473.69,3562 4497.69,3586 ; 4473.69,3562 4473.69,3544 4677.69,3340 ; 4497.69,3586 4389.69,3694 4389.69,3754 4463.69,3828 4485.55,3828 4501.1,3843.55 ; 4497.69,3586 4613.69,3702 4613.69,3734 4504.14,3843.55 4501.1,3843.55 ; 4684.95,3428 ccw(c4663.69,3428) 4684.95,3428
  Bottom Layer w10: 3789.69,3748 4073.69,4032 ; 3790.69,3557 3807.78,3574.09 3807.78,3688.09 4113.69,3994 ; 3791.69,3432 3891.69,3532 3891.69,3644 4179.69,3932 ; 3791.69,3508 3841.78,3558.09 3841.78,3670.09 4141.69,3970 ; 3791.69,3532 3825.78,3566.09 3825.78,3680.09 4127.69,3982 ; 3791.69,3724 4085.69,4018 ; 3791.69,3776 4059.69,4044 ; 3791.69,3802 4047.69,4058 ; 3791.78,3586.09 3791.78,3698.09 4099.69,4006 ; 3793.69,3458 3875.69,3540 3875.69,3654 4165.69,3944 ; 3793.69,3484 3857.69,3548 3857.69,3662 4153.69,3958 ; 3907.69,5114 3907.69,4330 4051.69,4186 ; 3925.69,5114 3925.69,4340.4 4066.09,4200 ; 3943.69,5114 3943.69,4348 4079.69,4212 ; 3959.69,5114 3959.69,4358 4091.69,4226 ; 3975.69,5114 3975.69,4366 4103.69,4238 ; 3991.69,5114 3991.69,4373.7 4115.69,4249.7 ; 4007.69,5114 4007.69,4384 4129.69,4262 ; 4023.69,5114 4023.69,4392 4141.69,4274 ; 4039.69,5114 4039.69,4402 4153.69,4288 ; 4055.69,5114 4055.69,4412 4169.69,4298 ; 4071.68,5114 4071.68,4420.01 4179.69,4312 ; LED？3.2 4763.07,4874 4791.69,4874 5179.69,4486 5179.69,4204 5160.86,4185.17 C164.2 5160.86,4163.34 ?.7 ?.6 ; LED？3.1 5153.69,4461.37 5153.69,4228 5132.86,4207.17 C164.1 5109.76,4227.93 5095.62,4227.93 5017.69,4150 5017.69,4120 5045.69,4092 5061.69,4092 ?.2 ; 4819.69,3176 5621.69,3176 5881.69,3436 7137.69,3436 ; 4839.69,3194 5615.69,3194 5873.69,3452 7139.69,3452 ; 4853.69,3212 5609.69,3212 5867.69,3470 7139.69,3470 ; 4873.69,3230 5601.69,3230 5859.69,3488 7139.69,3488 ; 4887.69,3248 5595.69,3248 5853.69,3506 7139.69,3506 ; 4905.69,3264 5587.69,3264 5847.69,3524 7139.69,3524 ; 4921.69,3282 5581.69,3282 5839.69,3540 7139.69,3540 ; 4941.69,3300 5575.69,3300 5831.69,3556 7139.69,3556 ; 4963.69,3318 5569.69,3318 5823.69,3572 7139.69,3572 ; 4975.69,3334 5561.69,3334 5815.69,3588 7139.69,3588 ; 4995.69,3352 5555.69,3352 5807.69,3604 7139.69,3604 ; 5015.69,3370 5549.69,3370 5799.69,3620 7138.77,3620 ; ?.1 5123.5,4062 5243.69,4062 v1(5269.69,4036) 5269.69,3892 5421.69,3740 6967.69,3740 7111.69,3884 7111.69,4962 6979.69,5094 5451.69,5094 5291.69,4934 5291.69,3896 5427.69,3760 6957.69,3760 7093.69,3896 7093.69,4948 6965.69,5076 5461.69,5076 5313.69,4928 5313.69,3902 5437.69,3778 6949.69,3778 7075.69,3904 7075.69,4938 6955.69,5058 5469.69,5058 5335.69,4924 5335.69,3906 5445.69,3796 6939.69,3796 7053.69,3910 7053.69,4928 6941.69,5040 5477.69,5040 5357.69,4920 5357.69,3916 5455.69,3818 6927.69,3818 7031.69,3922 7031.69,4918 6933.69,5016 5483.69,5016 5377.69,4910 5377.69,3932 5467.69,3842 6915.69,3842 7007.69,3934 7007.69,4892 6905.69,4994 5497.69,4994 5399.69,4896 5399.69,3944 5479.69,3864 6899.69,3864 6985.69,3950 6985.69,4870 6881.69,4974 5511.69,4974 5419.69,4882 5419.69,3962 5497.69,3884 6883.69,3884 6965.69,3966 6965.69,4840 6853.69,4952 5523.69,4952 5439.69,4868 5439.69,3974 5509.69,3904 6867.69,3904 6943.69,3980 6943.69,4820 6833.69,4930 5535.69,4930 5461.69,4856 5461.69,3986 5521.69,3926 6853.69,3926 6923.69,3996 6923.69,4804 6817.69,4910 5545.69,4910 5481.69,4846 5481.69,3996 5533.69,3944 6841.69,3944 6905.69,4008 6905.69,4784 6799.69,4890 5565.69,4890 5503.69,4828 5503.69,4012 5553.69,3962 6831.69,3962 6887.69,4018 6887.69,4772 6789.69,4870 5581.69,4870 5529.69,4818 5529.69,4020 5567.69,3982 6815.69,3982 6865.69,4032 6865.69,4758 6781.69,4842 5595.69,4842 5555.69,4802 ; ?.8 5135.69,4086 5220.04,4086 5269.69,4135.65 v1(5269.69,4138) ; 5551.69,4806 5553.69,4804 v1(5553.69,4240) 5553.69,4038 ; 5555.69,4036 5583.69,4008 6801.69,4008 6837.69,4044 6837.69,4750 6775.69,4812 5605.69,4812 5577.69,4784 5577.69,4240

## Keep-outs
Board Outline Layer:
  lines w10 net "": 3779.69,3125.2 ccw(c3904.88,3125.2) 3904.88,3000 7024.57,3000 ccw(c7024.57,3125.2) 7149.77,3125.2 7149.77,5000.79 ccw(c7024.57,5000.79) 7024.57,5125.98 3904.88,5125.98 ccw(c3904.88,5000.79) 3779.69,5000.79 3779.69,3125.2

## Other copper
Top Layer:
  region net "": 5913.33,4202.38 6031.69,4202.38 6031.69,4230 5913.33,4230
  region net "": 5927.39,4044.64 6032.39,4044.64 6032.39,4188.64 5927.39,4188.64
  region net "": 5912.82,4006 6031.69,4006 6031.69,4031.18 5912.82,4031.18
  region net S$45027: 5036.74,4162 5209.58,4162 5209.58,4427.25 5036.74,4427.25
  region net S$45027: 5017.69,3597.5 5172.69,3597.5 5172.69,3818 5017.69,3818
  region net U3_2: 6119.74,4074.64 6398.74,4074.64 6398.74,4158.64 6119.74,4158.64
  region net S$61466: 6437.23,4095.14 6922.23,4095.14 6922.23,4138.14 6437.23,4138.14
  region net U15_14: 5770.69,4272 5831.69,4272 5831.69,4792 5770.69,4792
  region net U15_14: 5773.19,3486.44 5834.19,3486.44 5834.19,3690.44 5773.19,3690.44
  region net U15_14: 5771.19,3914.94 5832.19,3914.94 5832.19,3966.94 5771.19,3966.94
  region net S$61466: 4833.53,3929.61 6098.53,3929.61 6098.53,3972.61 4833.53,3972.61
  region net S$61466: 6072.83,3936 6097.83,3936 6097.83,4298 6072.83,4298
  region net U15_14: 5498.69,4272.5 6098.69,4272.5 6098.69,4299.5 5498.69,4299.5
  region net "": 4523.69,3340 4585.69,3340 4585.69,3506 4523.69,3506
  region net "": 4478.22,3340 4553.99,3340 4553.99,3390.18 4478.22,3390.18
  region net "": 5517.86,4014 5541.37,4014 5541.37,4223.83 5517.86,4223.83
  region net U3_2: 6369.37,4875 6046.98,3365 6150.8,3365 6470.44,4875
  region net "": 6971.97,4189.14 6985.97,4175.14 6985.97,4053.14 6970.97,4038.14 6935.97,4038.14 6935.97,4189.14
  region net "": 5745.83,4835 5759.83,4849 5827.83,4849 5842.83,4834 5842.83,4805 5745.83,4805
  region net "": 5251.19,3403 5237.19,3389 5115.19,3389 5100.19,3404 5100.19,3439 5251.19,3439
  region net "": 4386.57,3333.76 4386.57,3403.76 4371.57,3403.76 4356.57,3388.76 4356.57,3353.76 4371.57,3333.76
  region net "": 4663.69,4468 4647.69,4412 4656.36,4398 4671.69,4390 4695.69,4474 4679.37,4480.62
Bottom Layer:
  region net "": 4312.69,3485 4391.51,3406.18 4392.12,3406.18 4289.98,3304.04 4289.74,3304.04 4211.1,3382.68 4211.1,3383.41
  region net "": 4289.74,3304.04 4333.25,3260.52 4333.25,3259.82 4316.69,3243.25 4316.69,3243 4272.89,3286.8 4272.89,3287.19
  region net "": 4463.69,4271.01 4541.69,4271.01 4541.69,4187.01 4515.69,4187.01 4463.69,4239.01
  region net "": 4851.12,4608.64 4897.22,4562.54 4897.22,4544.5 4889.22,4536.5 4825.22,4600.5 4835.33,4610.61
  region net "": 4843.44,4571.75 4862.44,4552.75 4785.94,4476.25 4766.94,4495.25
  region net U7_6: 4717.69,4286.69 4745.69,4314.69 4745.69,4146.34 4717.69,4118.34
  region net 1: 4573.69,3942 4605.69,3910 4597.69,3902 4583.69,3902 4565.69,3920 4565.69,3936 4571.69,3942
  region net 1: 4289.69,3114 4257.69,3146 4265.69,3154 4279.69,3154 4297.69,3136 4297.69,3120 4291.69,3114
  region net 1: 4490.69,4545.92 4540.69,4495.92 4540.69,4441.92 4514.69,4415.92 4442.69,4415.92 4388.69,4361.92 4346.69,4361.92 4294.69,4413.92 4294.69,4507.92 4332.69,4545.92
  region net 1: 4631.42,3986.28 4590.42,4027.28 4597.42,4034.28 4613.42,4034.28 4639.42,4008.28 4639.42,3992.28 4633.39,3986.25

## Silkscreen, mask and mechanical layers (free items; w line width, h text height)
Top Silkscreen Layer:
  drawing of 259 lines, arcs and shapes, not listed
  text "浦东临港校区" at 5740.38,3240.81 h80.28
  text "浦东新区沪城环路1851号 /  邮政编码：201306" at 4924.28,3179.02 h81.19
Bottom Silkscreen Layer:
  drawing of 312 lines, arcs and shapes, not listed
  text "杨浦区长阳路2588号 /  邮政编码：200090" at 5222.18,4418.18 h54.15 r315
  text "杨浦平凉路校区" at 4435.09,4084.56 h53.52 r45
  text "杨浦长阳路校区" at 5133.49,3511.25 h66.9 r315
Top Solder Mask Layer:
  drawing of 211 lines, arcs and shapes, not listed
Bottom Solder Mask Layer:
  drawing of 168 lines, arcs and shapes, not listed
Mech6:
  lines w10 net "": 4043.69,4682 4045.69,4682 4241.69,4878